# Altium PCB RFSOC_SAWG_Mezzanine.PcbDoc (part 1 of 2)
Units mm, origin at the board's own origin, x right, y up, seen from the top; angles counter-clockwise.
Board outline 64.4 x 72.39 mm, 4 copper layers (Top Layer, Layer 1, Layer 2, Bottom Layer), stack 1.429 mm thick; 92 components, 68 nets, 314 pads, 245 vias.
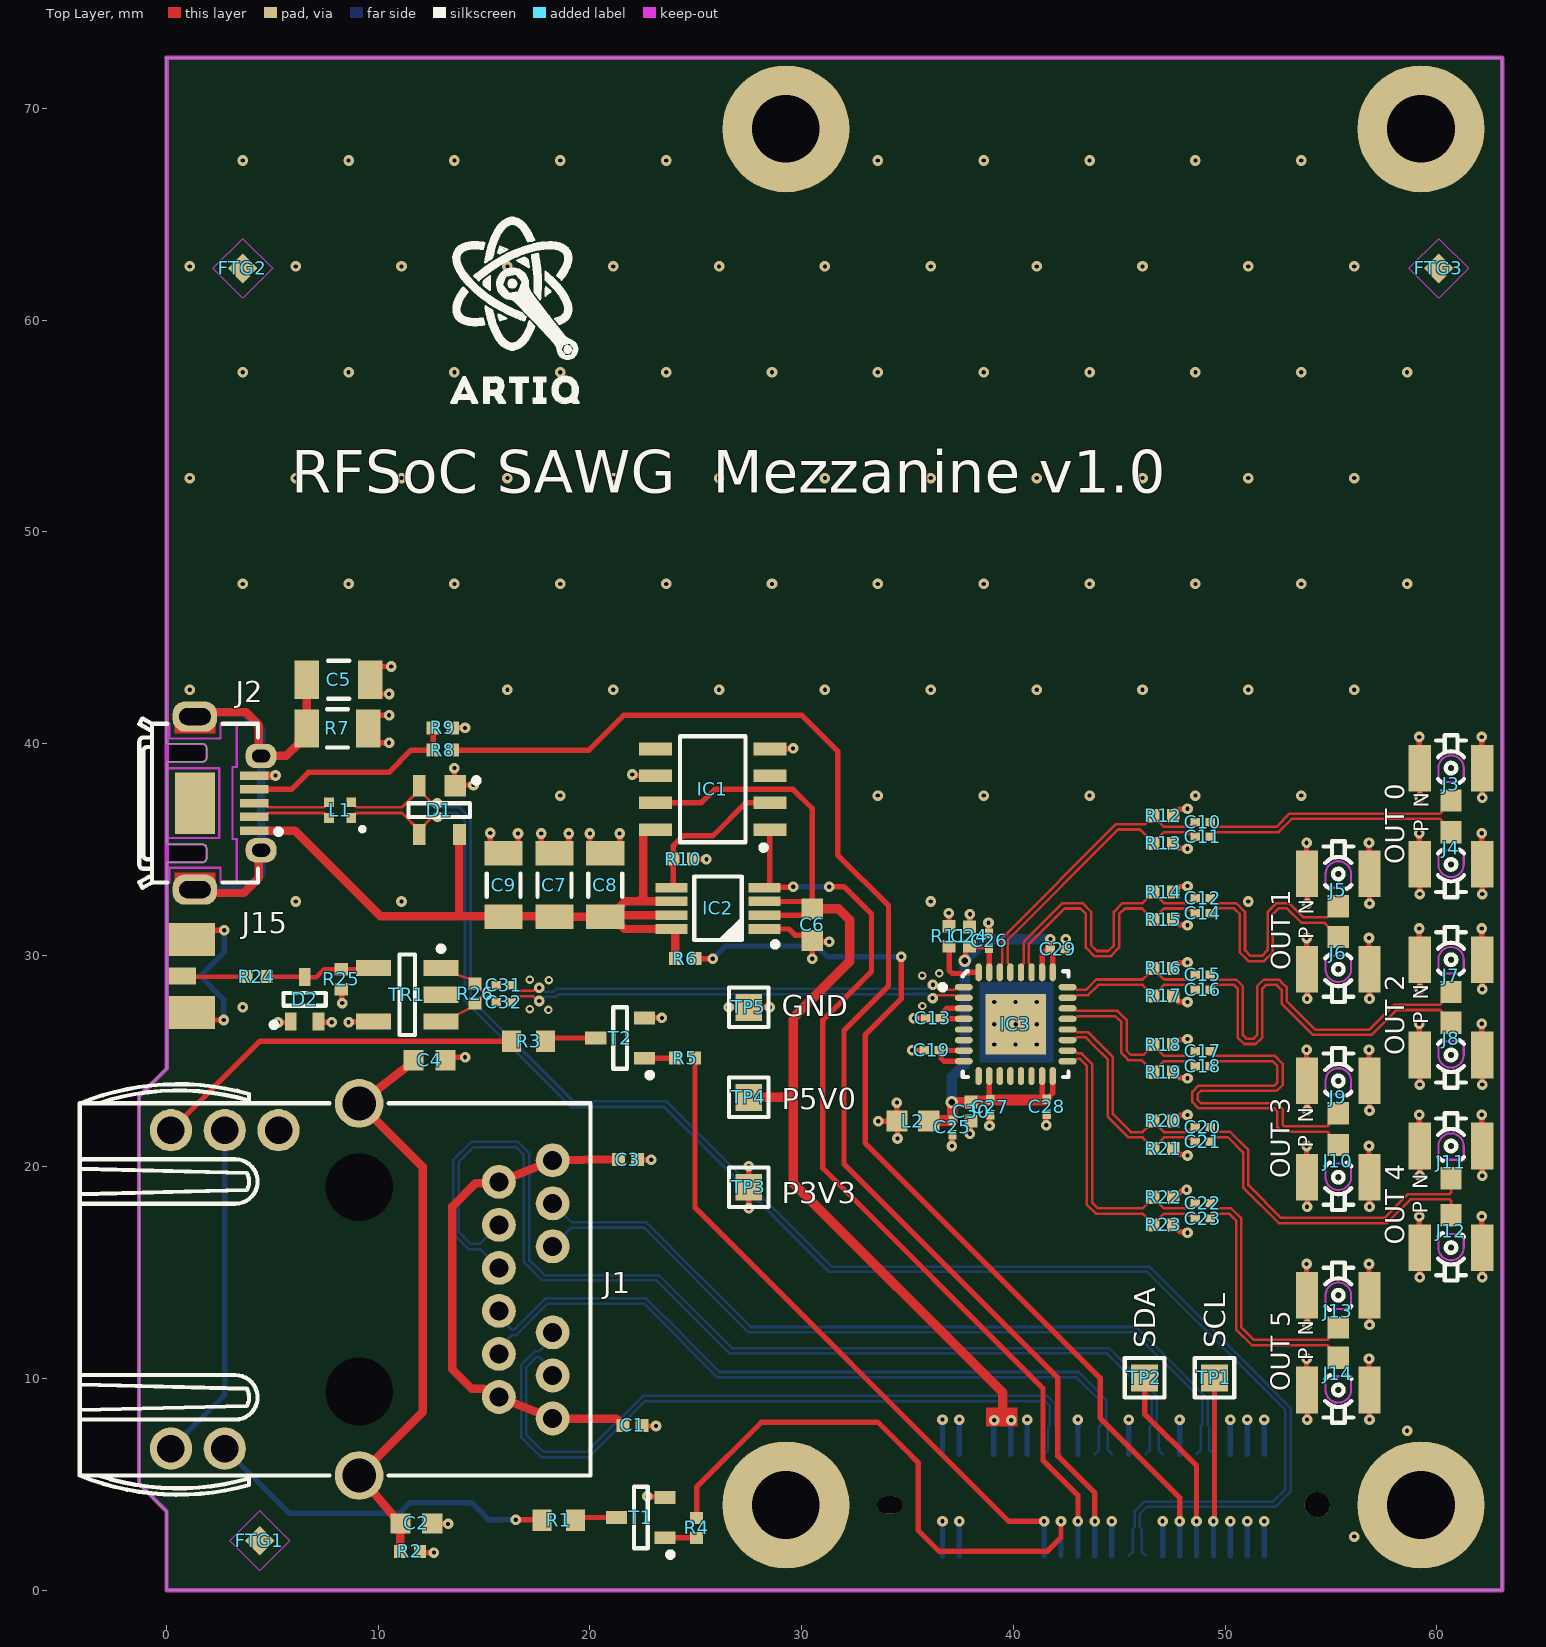
[diagram p0: Top Layer view]
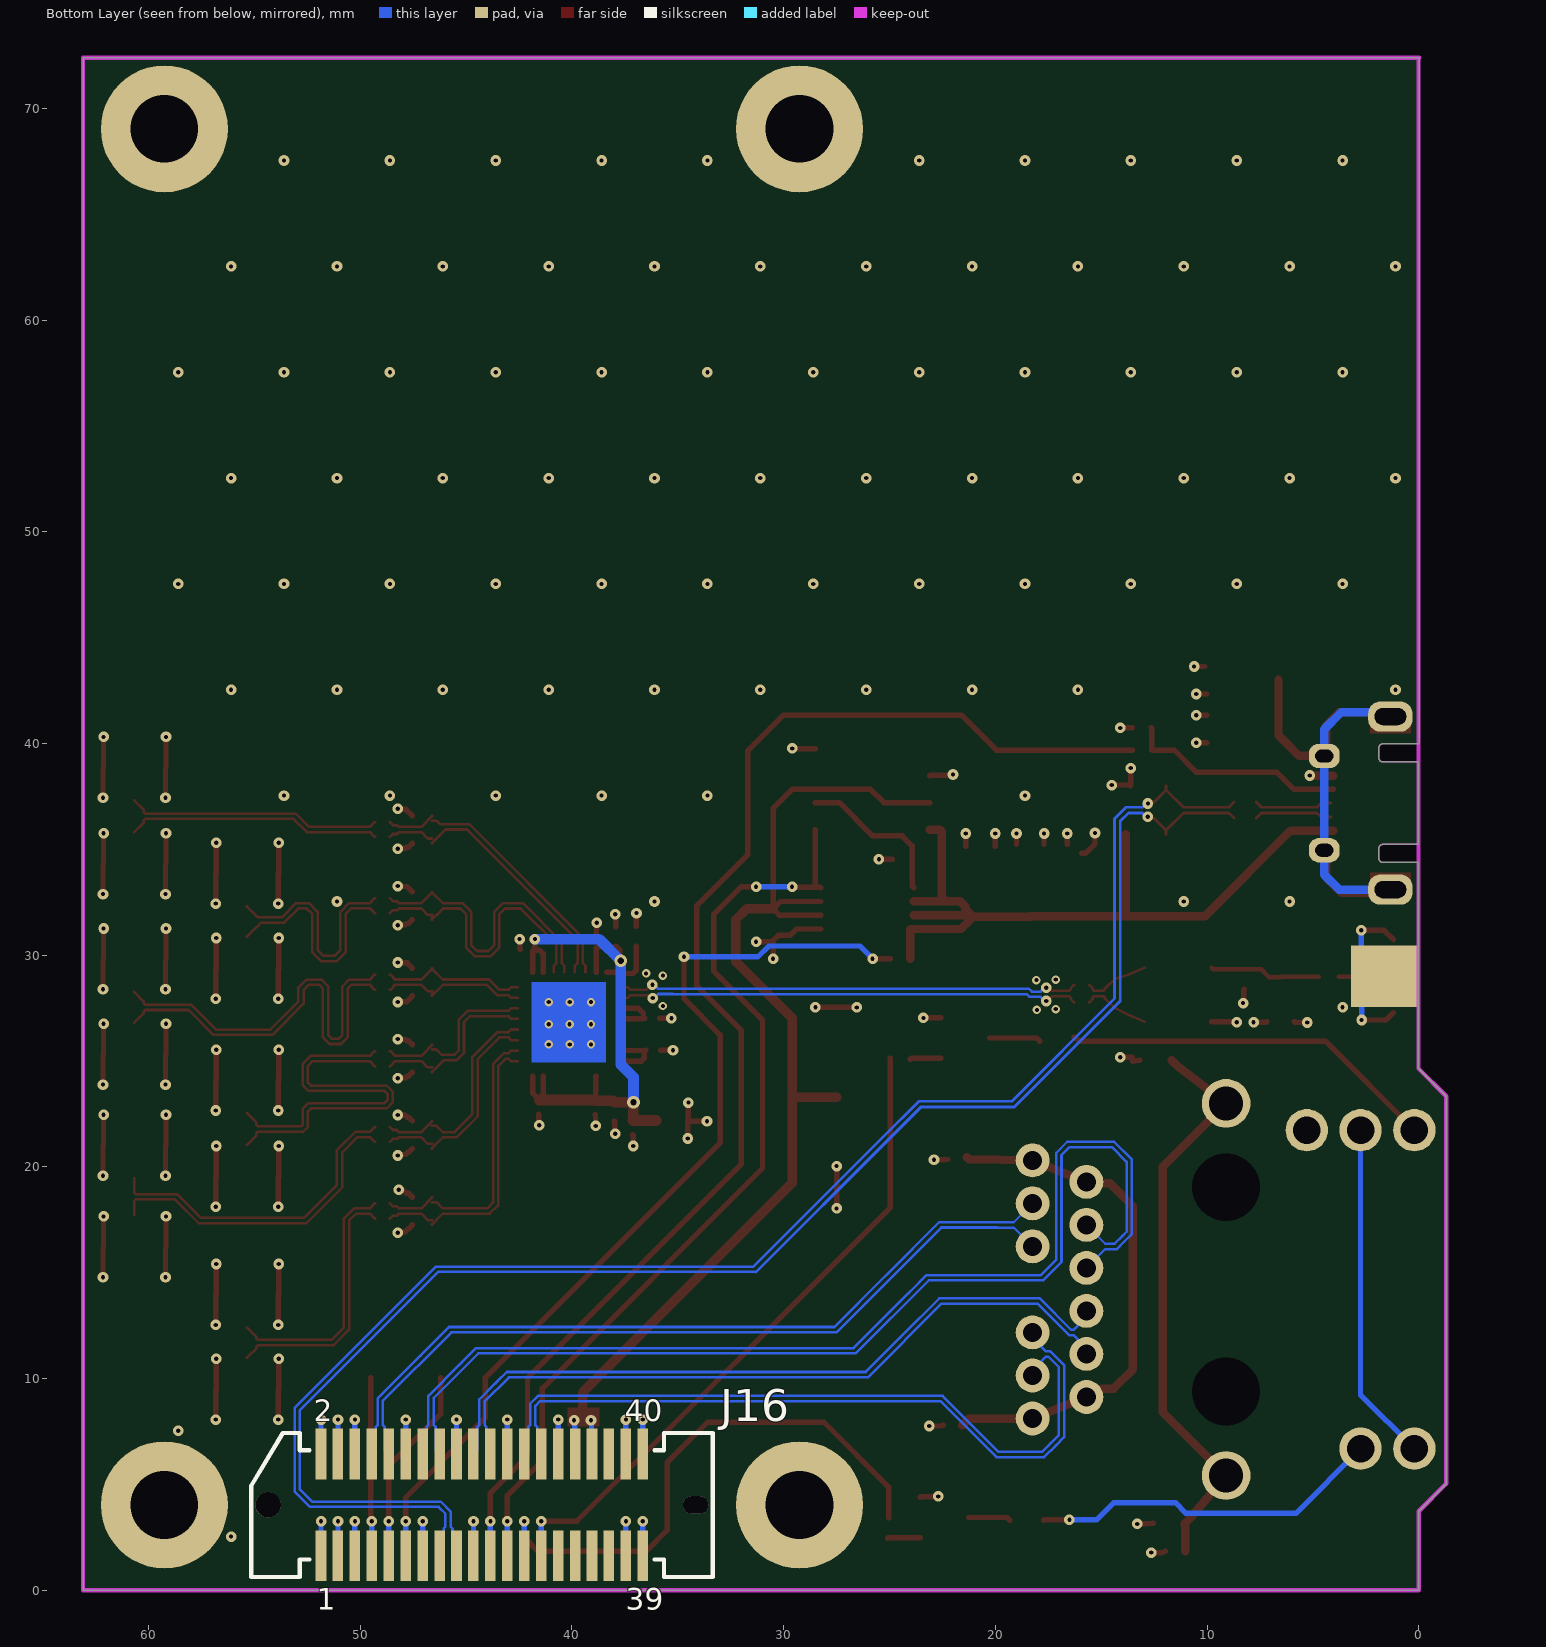
[diagram p1: Bottom Layer view, seen from below]
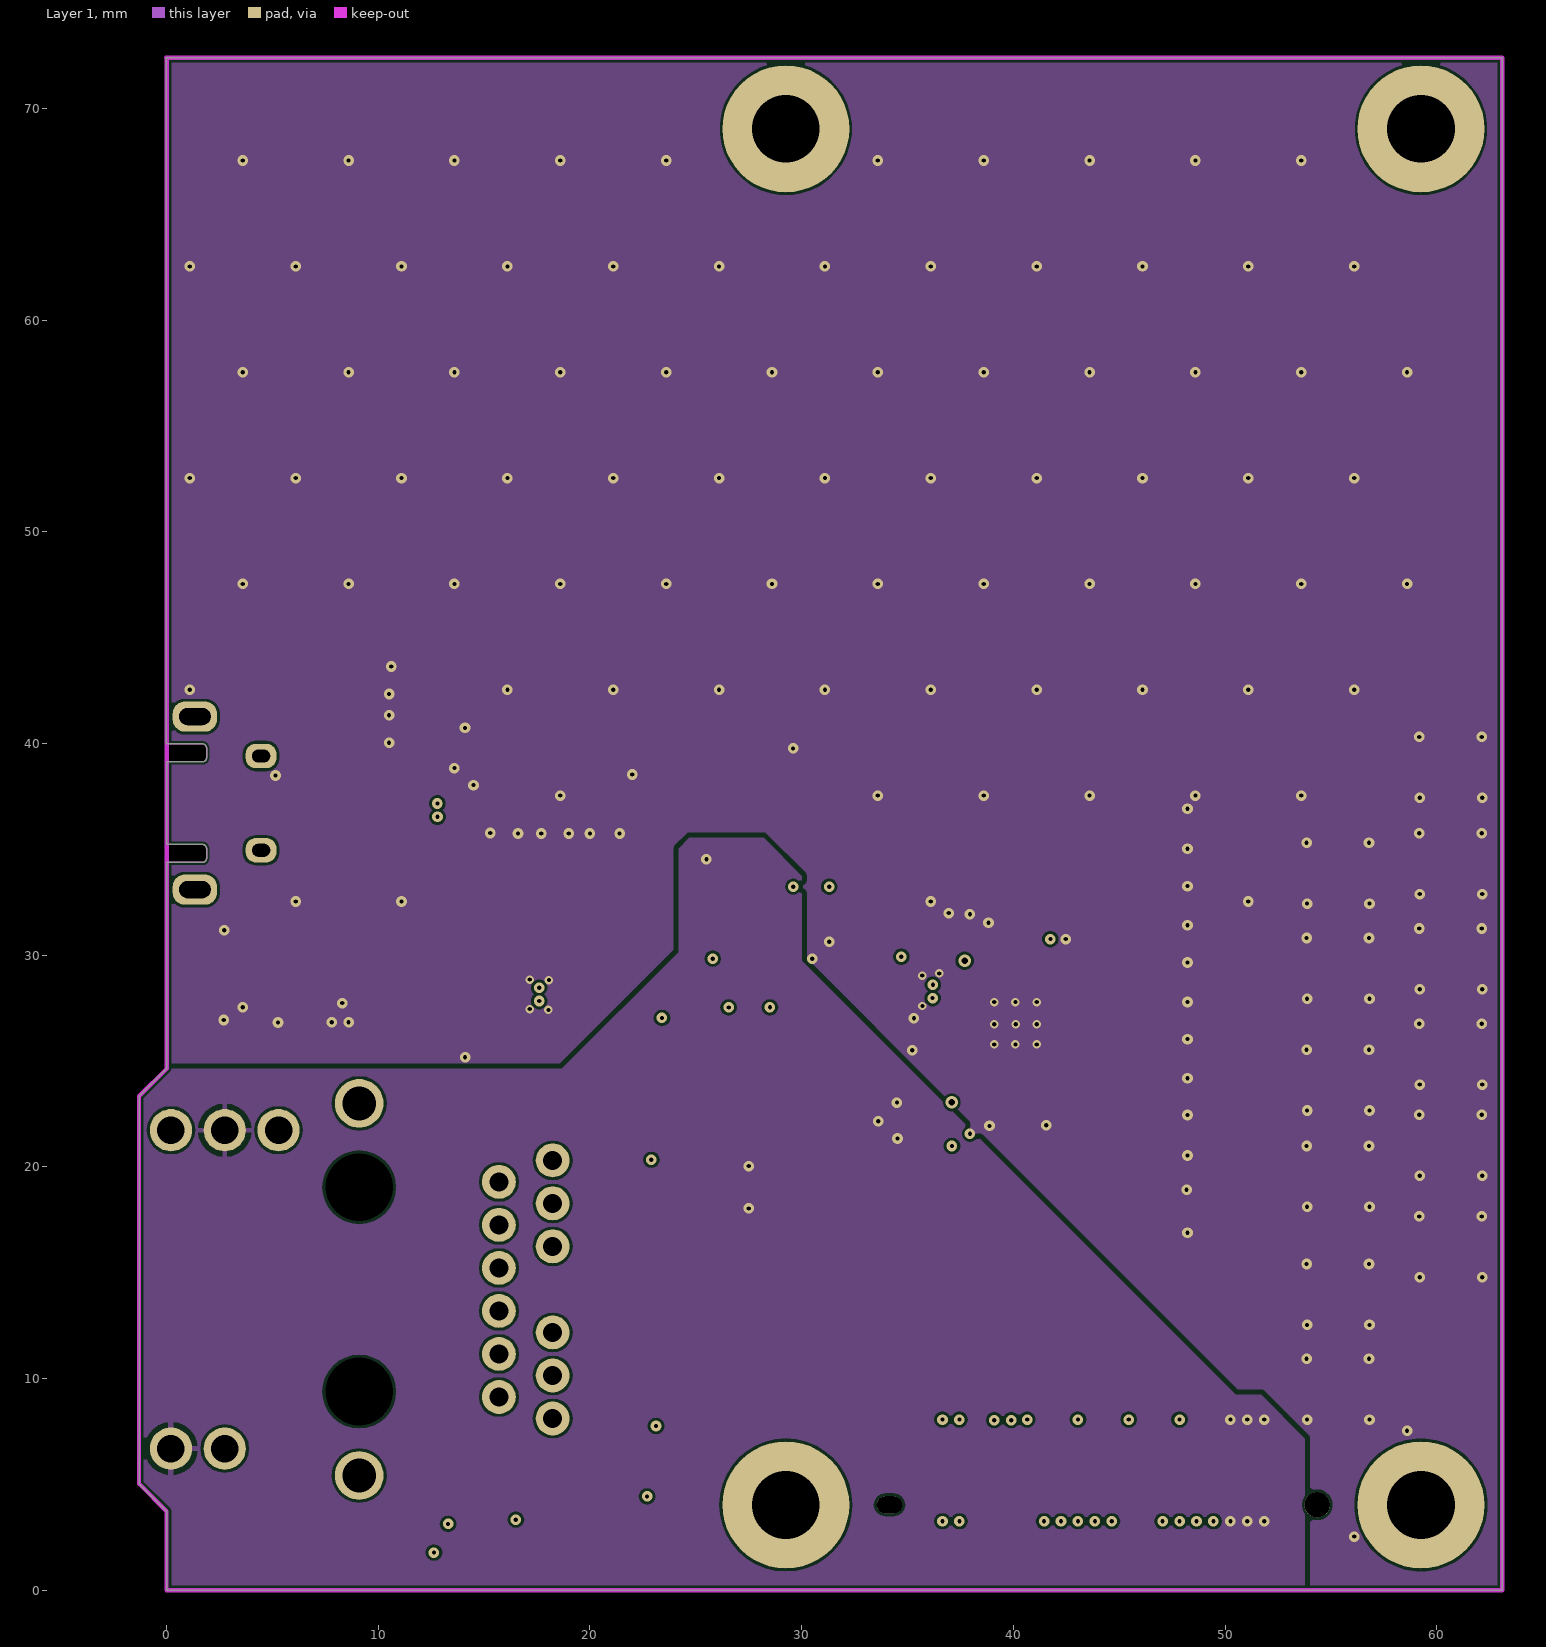
[diagram p2: Layer 1]
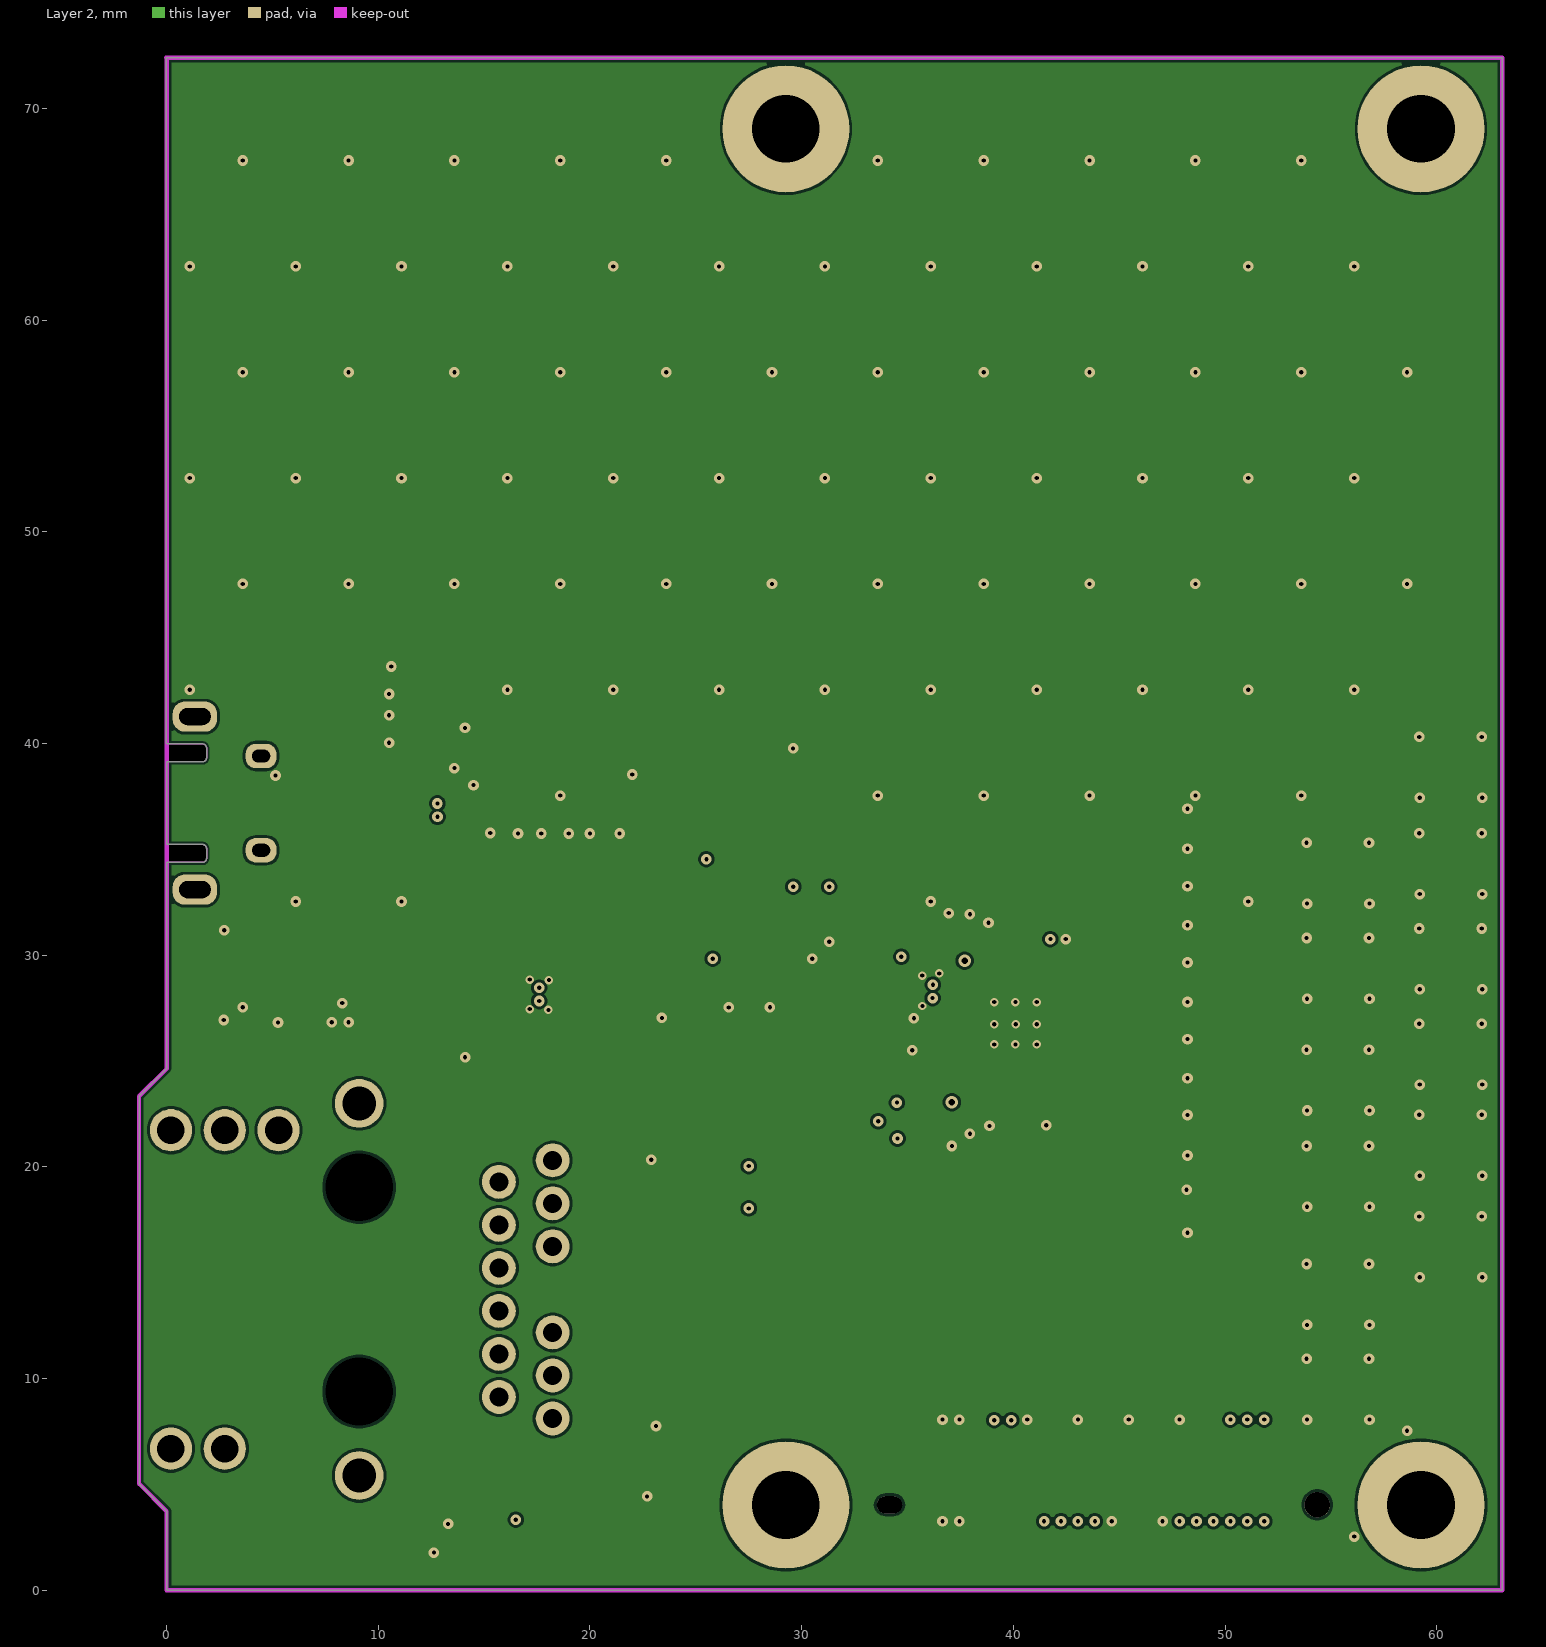
[diagram p3: Layer 2]
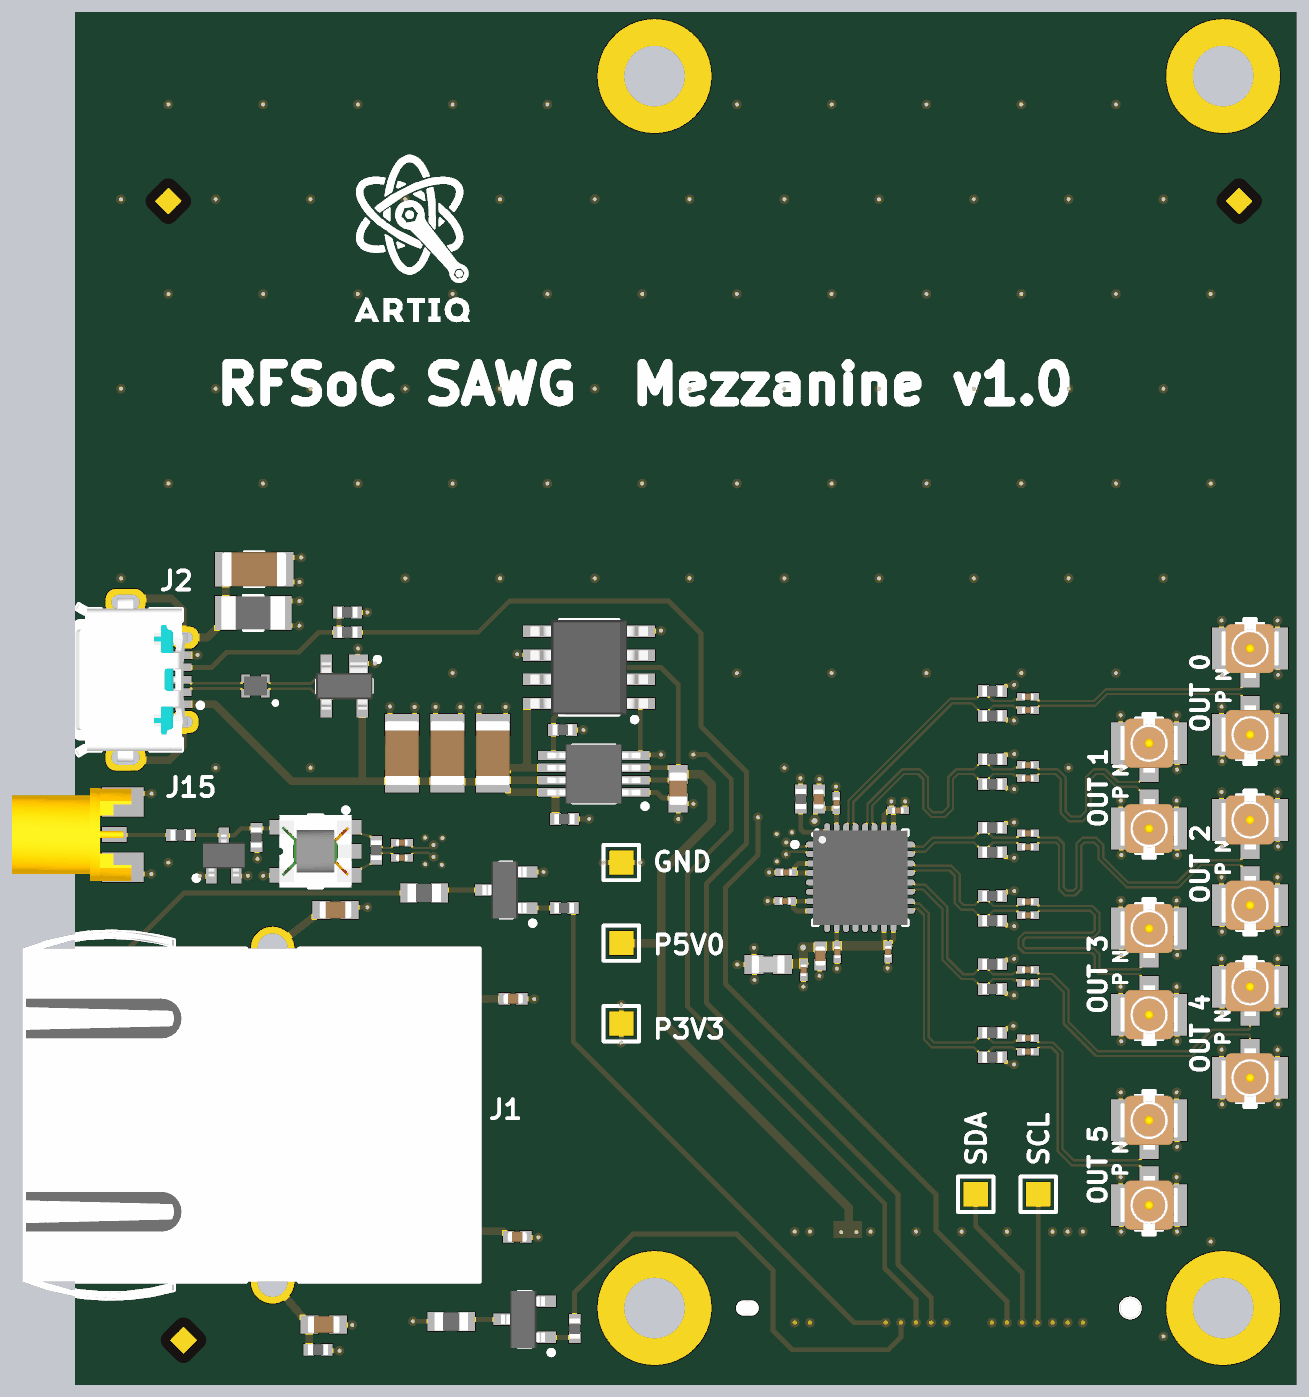
[diagram p5: 3D render of the assembled board from above, using the file's embedded part models]

## Layer stack, top to bottom
Top Solder: solder mask 0.0102, Solder Resist, Dk 3.5
Top Layer: signal copper 0.047
Dielectric 1: prepreg 0.11, FR-4, Dk 4.53
Layer 1: signal copper 0.0175
Dielectric 3: core 1.08, PP-006, Dk 4.53
Layer 2: signal copper 0.0175
Dielectric 2: prepreg 0.11, FR-4, Dk 4.53
Bottom Layer: signal copper 0.047
Bottom Solder: solder mask 0.0102, Solder Resist, Dk 3.5

## Board outline
0,1.035 0,3.735 -1.3,5.035 -1.3,23.335 -0.024,24.611 0.015,24.65 0.015,34.381 1.69,34.381 ccw(c1.69,34.581) 1.89,34.581 1.89,35.031 ccw(c1.69,35.031) 1.69,35.231 0.015,35.231 0.015,39.131 1.69,39.131 ccw(c1.69,39.331) 1.89,39.331 1.89,39.781 ccw(c1.69,39.781) 1.69,39.981 0.015,39.981 -0.024,40.02 -0.024,72.39 63.095,72.39 63.095,0 0,0

## Design rules (kind name [scope] priority, off if disabled: settings)
Clearance Clearance_J2 [InComponent('J2')   or InComponent('J15') vs IsKeepOut] p1: gap=0 ignorepadtopadclearanceinfootprint=FALSE
Clearance [All] p2: gap=0.13 ignorepadtopadclearanceinfootprint=FALSE except(0.254: Poly-Poly)
DiffPairsRouting "DiffPairsRouting  D90" [InDifferentialPairClass('90 Ohms Trace diff')] p1: maxlimit=0.254 minlimit=0.13 mostfreqgap=0.254 toplayer_maxgap=0.13 toplayer_prefgap=0.13 toplayer_minwidth=0.135 toplayer_maxwidth=0.135 toplayer_prefwidth=0.135 bottomlayer_maxgap=0.13 bottomlayer_prefgap=0.13 bottomlayer_minwidth=0.135 bottomlayer_maxwidth=0.135 bottomlayer_prefwidth=0.135 impedanceprofiledriven=TRUE impedanceprofileid={72E0920B-79AC-4615-891C-ACB3AE737586} impedanceprofilevalue=90.000000 maxuncoupledlength=12.7
DiffPairsRouting "DiffPairsRouting D100" [All] p2: maxlimit=0.254 minlimit=0.127 mostfreqgap=0.254 toplayer_mingap=0.13 toplayer_maxgap=0.13 toplayer_prefgap=0.13 toplayer_minwidth=0.12 toplayer_maxwidth=0.12 toplayer_prefwidth=0.12 bottomlayer_mingap=0.13 bottomlayer_maxgap=0.13 bottomlayer_prefgap=0.13 bottomlayer_minwidth=0.12 bottomlayer_maxwidth=0.12 bottomlayer_prefwidth=0.12 impedanceprofiledriven=TRUE impedanceprofileid={ECFD33D8-8AF5-47F1-B295-A9A58BAB6234} impedanceprofilevalue=100.000000 maxuncoupledlength=12.7
HoleSize [All] p1: absolutevalues=TRUE maxlimit=5 minlimit=0.2 maxpercent=80.000 minpercent=20.000
MatchedLengths [InxSignalClass('All xSignals')] p1: tolerance=0.5 checknetsindiffpair=FALSE checkdiffpairvsdiffpair=TRUE checkxsignals=TRUE checkothers=TRUE
MinimumSolderMaskSliver [All] p1: minsoldermaskwidth=0.01
PolygonConnect [All] p1: thpad.connectstyle=Relief thpad.reliefconductorwidth=0.254 thpad.reliefentries=4 thpad.polygonreliefangle="90 Angle" thpad.airgapwidth=0.254 smdpad.connectstyle=Direct smdpad.reliefconductorwidth=0.254 smdpad.reliefentries=4 smdpad.polygonreliefangle="90 Angle" smdpad.airgapwidth=0.254 via.connectstyle=Direct via.reliefconductorwidth=0.254 via.reliefentries=4 via.polygonreliefangle="90 Angle" via.airgapwidth=0.254
RoomDefinition U_MicroUSB [InComponentClass('U_MicroUSB')] p1: confinementstyle=ConfineIn formatcopy=TRUE lockcomponents=FALSE outline 80.494,8.535 90.781,8.535 90.781,-12.865 80.494,-12.865
RoomDefinition U_ETH-PHY [InComponentClass('U_ETH-PHY')] p2: confinementstyle=ConfineIn formatcopy=TRUE lockcomponents=FALSE outline 67.286,-12.765 88.2,-12.765 88.2,9.135 67.286,9.135
RoomDefinition U_Clock_fanout [InComponentClass('U_Clock_fanout')] p3: confinementstyle=ConfineIn formatcopy=TRUE lockcomponents=FALSE outline 94.845,-10.668 112.625,-10.668 112.625,9.652 94.845,9.652
RoomDefinition RFSOC_SAWG_Mezzanine [InComponentClass('RFSOC_SAWG_Mezzanine')] p4: confinementstyle=ConfineIn formatcopy=TRUE lockcomponents=FALSE outline 86.336,-13.081 70.588,-13.081 70.588,9.017 86.336,9.017
RoutingVias [All] p1: holewidth=0.2 width=0.5 viastyle="Through Hole" minholewidth=0.2 minwidth=0.4 maxholewidth=0.711 maxwidth=1.27
SilkToSilkClearance [All] p1: silktosilkclearance=0.1
SilkToSolderMaskClearance [IsPad] p1: minsilkscreentomaskgap=0.1 clearancetoexposedcopper=TRUE
SolderMaskExpansion SolderMaskExpansion_via [IsVia] p1: expansion=0.102 istentingtop=TRUE
SolderMaskExpansion [All] p2: expansion=0.05 istentingtop=FALSE
Width [All] p1: maxlimit=0.5 minlimit=0.12 preferedwidth=0.254
25 further rules are at their usual default settings.

## Classes and differential pairs
component class RFSOC_SAWG_Mezzanine: FTG1 FTG2 FTG3 J15 J16 TP1 TP2 TP3 TP4 TP5
differential pair class LVPECL: BUF_OUT0 BUF_OUT1 BUF_OUT2 BUF_OUT3 BUF_OUT4 BUF_OUT5 BUF_OUT6 BUF_OUT7 BUF_OUTC0 BUF_OUTC1 BUF_OUTC2 BUF_OUTC3 BUF_OUTC4 BUF_OUTC5 BUF_OUTC6 BUF_OUTC7
differential pair class Diff_100Ohm: EXT_CLK0 EXT_CLKC0
differential pair class "90 Ohms Trace diff": USB USB0_D
net class D90: USB0_D_N USB0_D_P USB_N USB_P
net class "50 Ohms Trace": EXT_CLK0 NetJ15_1
component class U_MicroUSB: C5 C6 C7 C8 C9 D1 IC1 IC2 IC8 J2 L1 R6 R7 R8 R9 R10
component class U_ETH-PHY: C1 C2 C3 C4 C55 C123 J1 J31 R1 R2 R3 R4 R5 R211 R212 R213 R214 R225 T1 T2 T24 T25
component class U_Clock_fanout: C10 C11 C12 C13 C14 C15 C16 C17 C18 C19 C20 C21 C22 C23 C24 C25 C26 C27 C28 C29 C30 C31 C32 D2 IC3 J3 J4 J5 J6 J7 J8 J9 J10 J11 J12 J13 J14 L2 R11 R12 R13 R14 R15 R16 R17 R18 R19 R20 R21 R22 R23 R24 R25 R26 TR1
differential pair USB: +USB_P -USB_N
differential pair USB0_D: +USB0_D_P -USB0_D_N
differential pair PHY_MDI3: +PHY_MDI3_P -PHY_MDI3_N
differential pair PHY_MDI2: +PHY_MDI2_P -PHY_MDI2_N
differential pair PHY_MDI1: +PHY_MDI1_P -PHY_MDI1_N
differential pair PHY_MDI0: +PHY_MDI0_P -PHY_MDI0_N
differential pair EXT_CLKC0: +EXT_CLKC0_P -EXT_CLKC0_N
differential pair EXT_CLK0: +EXT_CLK0_P -EXT_CLK0_N
differential pair BUF_OUTC5: +BUF_OUTC5_P -BUF_OUTC5_N
differential pair BUF_OUTC4: +BUF_OUTC4_P -BUF_OUTC4_N
differential pair BUF_OUTC3: +BUF_OUTC3_P -BUF_OUTC3_N
differential pair BUF_OUTC2: +BUF_OUTC2_P -BUF_OUTC2_N
differential pair BUF_OUTC1: +BUF_OUTC1_P -BUF_OUTC1_N
differential pair BUF_OUTC0: +BUF_OUTC0_P -BUF_OUTC0_N
differential pair BUF_OUT5: +BUF_OUT5_P -BUF_OUT5_N
differential pair BUF_OUT4: +BUF_OUT4_P -BUF_OUT4_N
differential pair BUF_OUT3: +BUF_OUT3_P -BUF_OUT3_N
differential pair BUF_OUT2: +BUF_OUT2_P -BUF_OUT2_N
differential pair BUF_OUT1: +BUF_OUT1_P -BUF_OUT1_N
differential pair BUF_OUT0: +BUF_OUT0_P -BUF_OUT0_N

## Components (designator, comment, footprint, x,y, rotation, side; value= is the part's Value field where it differs from the comment)
C1 "100nF" CAPC1005X55N 22.015,7.791 r0 top
C2 "Undefined" CAPC1608X90N 11.8,3.16 r0 top
C3 "100nF" CAPC1005X55N 21.792,20.346 r180 top
C4 "Undefined" CAPC1608X90N 12.421,25.037 r0 top
C5 "47pF" CAPC3216X140N 8.125,43.01 r0 top
C6 "10uF" CAPC1608X80N 30.5,31.435 r270 top
C7 "47uF" CAPC3216X180N 18.325,33.31 r90 top
C8 "47uF" CAPC3216X180N 20.725,33.31 r270 top
C9 "47uF" CAPC3216X180N 15.925,33.31 r270 top
C10 "100nF" CAPC0603X33N 48.952,36.285 r0 top
C11 "100nF" CAPC0603X33N 48.952,35.583 r0 top
C12 "100nF" CAPC0603X33N 48.952,32.687 r0 top
C13 "100nF" CAPC0603X33N 36.202,27.021 r0 top
C14 "100nF" CAPC0603X33N 48.952,31.985 r0 top
C15 "100nF" CAPC0603X33N 48.952,29.079 r0 top
C16 "100nF" CAPC0603X33N 48.952,28.36 r0 top
C17 "100nF" CAPC0603X33N 48.952,25.469 r0 top
C18 "100nF" CAPC0603X33N 48.952,24.76 r0 top
C19 "100nF" CAPC0603X33N 36.15,25.51 r0 top
C20 "100nF" CAPC0603X33N 48.952,21.88 r0 top
C21 "100nF" CAPC0603X33N 48.952,21.185 r0 top
C22 "100nF" CAPC0603X33N 48.952,18.275 r0 top
C23 "100nF" CAPC0603X33N 48.952,17.56 r0 top
C24 "1uF" CAPC1005X55N 37.925,30.885 r270 top
C25 "100nF" CAPC0603X33N 37.125,21.86 r90 top
C26 "100nF" CAPC0603X33N 38.85,30.685 r270 top
C27 "100nF" CAPC0603X33N 38.9,22.81 r90 top
C28 "100nF" CAPC0603X33N 41.575,22.835 r90 top
C29 "470nF" CAPC0603X33N 42.1,30.285 r180 top
C30 "22pF" CAPC1005X55N 38,22.61 r90 top
C31 "100nF" CAPC0603X33N 15.925,28.585 r0 top
C32 "100nF" CAPC0603X33N 15.925,27.785 r0 top
D1 "PRTR5V0U2X" SOT190P230X110-4N 12.884,36.851 r270 top
D2 "BAS70-04W" SOT65P210X110-3N 6.525,27.91 r90 top
FTG1 "Use only in PCB" FIDUCIAL_TOP_S100-200 4.4,2.335 r90 top
FTG2 "Use only in PCB" FIDUCIAL_TOP_S100-200 3.6,62.435 r90 top
FTG3 "Use only in PCB" FIDUCIAL_TOP_S100-200 60.1,62.435 r90 top
IC1 "AP2196SG-13" SOIC127P600X175-8N 25.8,37.835 r180 top
IC2 "BD82046FVJ" SOP65P490X110-8N 26.05,32.21 r180 top
IC3 "ADCLK948BCPZ" QFN50P500X500X80-33N-S285 40.11,26.738 r0 top
J1 "RJ45" BEL_L829-1J1T-43 16.97,14.21 r90 top
J2 "Micro-USB AB 2.0" HIROSE_ZX62RD-AB-5P8 4.14,37.181 r270 top
J3 "U.FL" HIROSE_U.FL-R-SMT-1(10) 60.675,38.835 r0 top
J4 "U.FL" HIROSE_U.FL-R-SMT-1(10) 60.675,34.285 r180 top
J5 "U.FL" HIROSE_U.FL-R-SMT-1(10) 55.35,33.835 r0 top
J6 "U.FL" HIROSE_U.FL-R-SMT-1(10) 55.35,29.335 r180 top
J7 "U.FL" HIROSE_U.FL-R-SMT-1(10) 60.675,29.785 r0 top
J8 "U.FL" HIROSE_U.FL-R-SMT-1(10) 60.675,25.285 r180 top
J9 "U.FL" HIROSE_U.FL-R-SMT-1(10) 55.35,24.06 r0 top
J10 "U.FL" HIROSE_U.FL-R-SMT-1(10) 55.35,19.51 r180 top
J11 "U.FL" HIROSE_U.FL-R-SMT-1(10) 60.675,20.985 r0 top
J12 "U.FL" HIROSE_U.FL-R-SMT-1(10) 60.675,16.185 r180 top
J13 "U.FL" HIROSE_U.FL-R-SMT-1(10) 55.35,13.935 r0 top
J14 "U.FL" HIROSE_U.FL-R-SMT-1(10) 55.35,9.46 r180 top
J15 "SMP" AMPHENOL_302102 0.746,29.009 r0 top
J16 "658807713040" 658807713040 44.253,4.032 r180 bottom
L1 "90@100MHz" IND_WURTH_WE-CNSW_0504 8.2,36.853 r180 top
L2 "120R@100MHz" INDC1608X65N 35.25,22.16 r180 top
R1 "340" RESC1608X55N 18.525,3.31 r180 top
R2 "0" RESC1005X40N 11.5,1.835 r180 top
R3 "340" RESC1608X55N 17.1,25.935 r180 top
R4 "1k" RESC1005X40N 25.038,2.947 r270 top
R5 "1k" RESC1005X40N 24.491,25.14 r180 top
R6 "10k" RESC1005X40N 24.5,29.835 r0 top
R7 "1M" RESC3216X65N 8.075,40.71 r0 top
R8 "0" RESC1005X40N 13.05,39.685 r0 top
R9 "0" RESC1005X40N 13.05,40.735 r180 top
R10 "10k" RESC1005X40N 24.4,34.535 r180 top
R11 "10k" RESC1005X40N 36.967,30.891 r270 top
R12 "200" RESC1005X40N 47.08,36.585 r0 top
R13 "200" RESC1005X40N 47.08,35.283 r0 top
R14 "200" RESC1005X40N 47.08,32.98 r0 top
R15 "200" RESC1005X40N 47.08,31.678 r0 top
R16 "200" RESC1005X40N 47.08,29.376 r0 top
R17 "200" RESC1005X40N 47.08,28.074 r0 top
R18 "200" RESC1005X40N 47.08,25.771 r0 top
R19 "200" RESC1005X40N 47.08,24.469 r0 top
R20 "200" RESC1005X40N 47.08,22.167 r0 top
R21 "200" RESC1005X40N 47.08,20.865 r0 top
R22 "200" RESC1005X40N 47.08,18.562 r0 top
R23 "200" RESC1005X40N 47.08,17.26 r0 top
R24 "0" RESC1005X40N 4.25,28.985 r0 top
R25 "Undefined" RESC1005X40N 8.25,28.86 r270 top
R26 "100" RESC1005X35N 14.575,28.185 r270 top
T1 "BC847B" SOT95P230X110-3N 22.4,3.435 r180 top
T2 "BC847B" SOT95P230X110-3N 21.425,26.085 r180 top
TP1 "Test Point" TPS127 49.5,10.035 r90 top
TP2 "Test Point" TPS127 46.2,10.035 r90 top
TP3 "Test Point" TPS127 27.5,19.035 r90 top
TP4 "Test Point" TPS127 27.5,23.285 r90 top
TP5 "Test Point" TPS127 27.5,27.535 r90 top
TR1 "1:1" XFMR_MINI-CIRCUITS_AT224 11.365,28.13 r270 top

## Footprints (in the part's own frame and the unit in brackets; to place one, negate y for a bottom-side part, rotate by r counter-clockwise, add the part's x,y. Pads: shape width x height; smd on the part's side, far side on the other; paste and mask are expansions set on the pad)
658807713040 [mm] "0.80mm SMT Female Shrouded Vertical Receptacle with Chamfer 7.75mm height, 40p"
  rect 0.5x2.4 smd: 1(-7.6,-2.4) 2(-7.6,2.4) 3(-6.8,-2.4) 4(-6.8,2.4) 5(-6,-2.4) 6(-6,2.4) 7(-5.2,-2.4) 8(-5.2,2.4) 9(-4.4,-2.4) 10(-4.4,2.4) 11(-3.6,-2.4) 12(-3.6,2.4) 13(-2.8,-2.4) 14(-2.8,2.4) 15(-2,-2.4) 16(-2,2.4) 17(-1.2,-2.4) 18(-1.2,2.4) 19(-0.4,-2.4) 20(-0.4,2.4) 21(0.4,-2.4) 22(0.4,2.4) 23(1.2,-2.4) 24(1.2,2.4) 25(2,-2.4) 26(2,2.4) 27(2.8,-2.4) 28(2.8,2.4) 29(3.6,-2.4) 30(3.6,2.4) 31(4.4,-2.4) 32(4.4,2.4) 33(5.2,-2.4) 34(5.2,2.4) 35(6,-2.4) 36(6,2.4) 37(6.8,-2.4) 38(6.8,2.4) 39(7.6,-2.4) 40(7.6,2.4)
  round 1.2 hole 1.2 unplated: M1(-10.1,0)
  oval 1.2x0.8 hole 0.8 slot 1.2 at 0 deg unplated: M2(10.1,0)
  silkscreen extent -10.9,-3.4 10.9,3.4, body extent -10.9,-3.4 10.9,3.4, height 7.97
AMPHENOL_302102 [mm] "50 Ohm RF Connector, SMP End Launch Jack for 1.6mm PCB,  Flat Tab Contact"
  rect 1.3x0.8 smd: 1(0,0)
  rect 2.2x1.55 smd: 2(0.45,-1.725) 2(0.45,1.725)
  rect 3.2x2.9 smd far side: 2(0.85,0)
  body extent -5.39,-2.45 2.41,2.45, height 2.64
BEL_L829-1J1T-43 [mm] "1 Port, Yellow/Green-Orange LEDs, Gigabit Ethernet, MagJack Connector Module"
  round 1.6 hole 0.9: 1(-5.08,1.27) 2(-3.048,1.27) 3(-1.016,1.27) 4(1.016,1.27) 5(3.048,1.27) 6(5.08,1.27) 7(-6.096,-1.27) 8(-4.064,-1.27) 9(-2.032,-1.27) 10(2.032,-1.27) 11(4.064,-1.27) 12(6.096,-1.27)
  round 2 hole 1.3: 13(-7.52,14.22) 14(-7.52,16.76) 15(7.52,11.68) 16(7.52,14.22) 17(7.52,16.76)
  round 2.3 hole 1.6: 18(-8.79,7.87) 19(8.79,7.87)
  round 1 hole 3.2 unplated mask+1.1: 20(-4.825,7.87) 21(4.825,7.87)
  silkscreen extent -9.7,-3.06 9.7,21.07, body extent -9.7,-3.06 9.69,21.07, height 12.21
CAPC0603X33N [mm] "Chip Capacitor, Body 0.6x0.30mm, IPC Medium Density"
  rect 0.45x0.4 smd: 1(-0.35,0) 2(0.35,0)
  body extent -0.31,-0.16 0.32,0.17, height 0.33
CAPC1005X55N [mm] "Capacitor, Non-Polarized, Chip; 1.00mm L X 0.50mm W X 0.70mm H, IPC Medium Density"
  rect 0.62x0.62 smd: 1(-0.45,0) 2(0.45,0)
  body extent -0.52,-0.27 0.53,0.28, height 0.55
CAPC1608X80N [mm] "Chip Capacitor, Body 1.6x0.8mm IPC Medium Density"
  rect 1x1 smd: 1(-0.75,0) 2(0.75,0)
  body extent -0.87,-0.47 0.88,0.48, height 0.8
CAPC1608X90N [mm] "Chip Capacitor, Body 1.6x0.8mm IPC Medium Density"
  rect 0.95x0.95 smd: 1(-0.75,0) 2(0.75,0)
  body extent -0.85,-0.45 0.85,0.45, height 0.9
CAPC3216X140N [mm] "Chip Capacitor, Body 3.2x1.6mm, IPC Medium Density"
  rect 1.15x1.8 smd: 1(-1.5,0) 2(1.5,0)
  silkscreen extent -0.5,-0.9 0.5,0.9, body extent -1.7,-0.9 1.7,0.9, height 1.4
CAPC3216X180N [mm] "Chip Capacitor, Body 3.2x1.6mm, IPC Medium Density"
  rect 1.15x1.8 smd: 1(-1.5,0) 2(1.5,0)
  silkscreen extent -0.55,-0.8 0.55,0.8, body extent -1.7,-0.9 1.7,0.9, height 1.8
FIDUCIAL_TOP_S100-200 [mm] "Square Fiducial Target, Top Layer, 1.0mm, Top Solder 2.0mm, Keepout =2.0mm"
  rect 1x1 smd rot 45 paste-0.51 mask+0.5: 1(0,0)
  Top Layer keep-out region: 1.414,0 0,-1.414 -1.414,0 0,1.414
HIROSE_U.FL-R-SMT-1(10) [mm] "Up to 6GHz Ultra Small Surface Mount Male Coaxial Connectors U.FL Series"
  rect 1x1.05 smd: 1(0,-1.525)
  rect 1.05x2.2 smd: 2(-1.475,0) 2(1.475,0)
  Top Layer keep-out lines w0.1: -0.6,-0.65 -0.6,0 cw(c0,0) 0.6,0 0.6,-0.65 -0.6,-0.65
  silkscreen extent -0.7,-0.69 0.7,1.55, body extent -1.5,-1.55 1.5,1.55, height 1.25
HIROSE_ZX62RD-AB-5P8 [mm] "Right Angle, SMD Micro-USB Type AB - Reverse (Top mount), Shell Through Hole"
  rect 0.4x1.35 smd: 1(1.3,0) 2(0.65,0) 3(0,0) 4(-0.65,0) 5(-1.3,0)
  rrect80% 1.425x2.1 hole 0.8 slot 1.5 at 90 deg: 6(-4.088,-2.8) 6(4.088,-2.8)
  rrect80% 1.15x1.45 hole 0.6 slot 0.85 at 90 deg: 6(-2.225,0.325) 6(2.225,0.325)
  rect 2.9x1.9 smd: PastePad(0,-2.8)
  Top Layer region: -4.2,-1.85 -4.2,-3.75 -3.3,-3.75 -3.3,-3.75 -3.3,-1.85
  Top Layer region: 4.2,-3.75 4.2,-1.85 3.3,-1.85 3.3,-1.85 3.3,-3.75
  Top Layer keep-out lines w0.1: 3.75,-4.125 3.75,-4 3.05,-4 3.05,-1.6 3.75,-1.6 3.75,-0.825 1.7,-0.825 1.7,-1.025 -1.7,-1.025 -1.7,-0.825 -3.75,-0.825 -3.75,-1.6 -3.05,-1.6 -3.05,-4 -3.75,-4 -3.75,-4.125 -2.8,-4.125 -2.8,-2.45 cw(c-2.6,-2.45) -2.6,-2.25 -2.15,-2.25 cw(c-2.15,-2.45) -1.95,-2.45 -1.95,-4.125 -1.65,-4.125 -1.65,-1.65 1.65,-1.65 1.65,-4.125 1.95,-4.125 1.95,-2.45 cw(c2.15,-2.45) 2.15,-2.25 2.6,-2.25 cw(c2.6,-2.45) 2.8,-2.45 2.8,-4.125 3.75,-4.125
  Keep-Out Layer board cut-out: 1.95,-4.125 1.95,-2.45 1.965,-2.373 2.009,-2.309 2.074,-2.265 2.15,-2.25 2.15,-2.25 2.6,-2.25 2.677,-2.265 2.741,-2.309 2.785,-2.373 2.8,-2.45 2.8,-2.45 2.8,-4.125
  Keep-Out Layer board cut-out: -2.8,-4.125 -2.8,-2.45 -2.785,-2.373 -2.741,-2.309 -2.676,-2.265 -2.6,-2.25 -2.6,-2.25 -2.15,-2.25 -2.073,-2.265 -2.009,-2.309 -1.965,-2.373 -1.95,-2.45 -1.95,-2.45 -1.95,-4.125
  silkscreen extent -4,-5.42 4,1.28, body extent -4.32,-5.42 4.33,0.47, height 2.78
IND_WURTH_WE-CNSW_0504 [mm] "Common Mode SMD Line Filter, Body 1.2x1.4mm"
  rect 0.45x0.45 smd: 1(-0.525,0.375) 2(0.525,0.375) 3(0.525,-0.375) 4(-0.525,-0.375)
  silkscreen extent -1.15,0.8 -0.95,1, body extent -0.6,-0.5 0.6,0.5, height 0.89
INDC1608X65N [mm] "Chip Inductor, 2-Leads, EIA 0603, Metric 1608, Body 1.6x0.8mm, IPC Medium Density"
  rect 1x1 smd: 1(-0.75,0) 2(0.75,0)
  body extent -0.87,-0.47 0.88,0.48, height 0.65
QFN50P500X500X80-33N-S285 [mm] "QFN, 0.50mm Pitch, Square; 8 Pin X 8 Pin, 5mm X 5mm X 0.80mm H body (w/thermal tab 2.85 X 2.85mm),  IPC Medium Density"
  oval 0.85x0.3 smd: 1(-2.45,1.75) 2(-2.45,1.25) 3(-2.45,0.75) 4(-2.45,0.25) 5(-2.45,-0.25) 6(-2.45,-0.75) 7(-2.45,-1.25) 8(-2.45,-1.75) 17(2.45,-1.75) 18(2.45,-1.25) 19(2.45,-0.75) 20(2.45,-0.25) 21(2.45,0.25) 22(2.45,0.75) 23(2.45,1.25) 24(2.45,1.75)
  oval 0.3x0.85 smd: 9(-1.75,-2.45) 10(-1.25,-2.45) 11(-0.75,-2.45) 12(-0.25,-2.45) 13(0.25,-2.45) 14(0.75,-2.45) 15(1.25,-2.45) 16(1.75,-2.45) 25(1.75,2.45) 26(1.25,2.45) 27(0.75,2.45) 28(0.25,2.45) 29(-0.25,2.45) 30(-0.75,2.45) 31(-1.25,2.45) 32(-1.75,2.45)
  rect 2.85x2.85 smd: 33(0,0)
  silkscreen extent -3.57,-2.5 2.5,2.5, body extent -2.5,-2.5 2.5,2.5, height 0.8
RESC1005X35N [mm] "Chip Resistor, EIA 0402, Metric 1005, Body 1.0x0.5mm, IPC Medium Density"
  rect 0.58x0.62 smd: 1(-0.47,0) 2(0.47,0)
  body extent -0.52,-0.27 0.53,0.28, height 0.35
RESC1005X40N [mm] "Chip Resistor, EIA 0402, Metric 1005, Body 1.0x0.5mm, IPC Medium Density"
  rect 0.58x0.62 smd: 1(-0.47,0) 2(0.47,0)
  body extent -0.52,-0.27 0.53,0.28, height 0.4
RESC1608X55N [mm] "Chip Resistor, EIA 0603, Metric 1608, Body 1.6x0.8mm, IPC Medium Density"
  rect 0.9x1 smd: 1(-0.8,0) 2(0.8,0)
  body extent -0.87,-0.47 0.88,0.48, height 0.55
RESC3216X65N [mm] "Chip Resistor, EIA 1206, Metric 3216, Body 3.2x1.6mm, IPC Medium Density"
  rect 1.15x1.8 smd: 1(-1.45,0) 2(1.45,0)
  silkscreen extent -0.5,-0.9 0.5,0.9, body extent -1.67,-0.87 1.68,0.88, height 0.65
SOIC127P600X175-8N [mm] "SOIC 8, Pitch 1.27mm - Body 4x5mm, IPC Medium Density"
  rect 1.55x0.6 smd: 1(-2.7,1.905) 2(-2.7,0.635) 3(-2.7,-0.635) 4(-2.7,-1.905) 5(2.7,-1.905) 6(2.7,-0.635) 7(2.7,0.635) 8(2.7,1.905)
  silkscreen extent -2.53,-2.5 1.55,2.88, body extent -3.1,-2.5 3.1,2.5, height 1.75
SOP65P490X110-8N [mm] "SOP, 0.65mm pitch; 8 pin, 3.00mm W X 3.00mm L X 1.10mm H body, IPC Medium Density"
  rect 1.5x0.45 smd: 1(-2.2,0.975) 2(-2.2,0.325) 3(-2.2,-0.325) 4(-2.2,-0.975) 5(2.2,-0.975) 6(2.2,-0.325) 7(2.2,0.325) 8(2.2,0.975)
  silkscreen extent -2.83,-1.5 1.12,1.82, body extent -2.45,-1.55 2.45,1.55, height 1.1
SOT65P210X110-3N [mm] "SOT323, 0.65mm pitch; 3 pin, 1.25mm W X 2.00mm L, IPC Medium Density"
  rect 0.85x0.55 smd: 1(-1.05,0.65) 2(-1.05,-0.65) 3(1.05,0)
  silkscreen extent -1.32,-1 0.3,1.57, body extent -1.1,-1.1 1.1,1.1, height 1.1
SOT95P230X110-3N [mm] "SOT23, 3 pin, Pitch 0.95mm - 1.3mm W X 2.9mm L X 1.1mm H, IPC Medium Density"
  rect 1x0.6 smd: 1(-1.15,0.95) 2(-1.15,-0.95) 3(1.15,0)
  silkscreen extent -1.53,-1.45 0.33,1.87, body extent -1.08,-1.5 1.25,1.5, height 1.1
SOT190P230X110-4N [mm] "SOT143, SOT, 1.90mm Pitch; 4 Pin, 1.30mm W X 2.90mm L X 1.10mm H body, IPC Medium Density"
  rect 1x1 smd: 1(-1.15,0.75)
  rect 1x0.6 smd: 2(-1.15,-0.95) 3(1.15,-0.95) 4(1.15,0.95)
  silkscreen extent -1.52,-1.45 0.33,1.88, body extent -1.25,-1.5 1.25,1.5, height 1.1
TPS127 [mm] "1.27 x  1.27mm SMD Test Point Area"
  rect 1.27x1.27 smd paste-1.27: 1(0,0)
  silkscreen extent -0.94,-0.94 0.94,0.94
XFMR_MINI-CIRCUITS_AT224 [mm] "MINI-CIRCUITS RF Transformer, Case AT224 - Body 3.81X3.81mm"
  rect 0.76x1.65 smd: 1(-1.27,1.59) 2(0,1.59) 3(1.27,1.59) 4(1.27,-1.59) 6(-1.27,-1.59)
  silkscreen extent -2.3,-0.37 1.91,1.73, body extent -1.9,-1.9 1.91,1.91, height 3.81

## Part data
C1 C3: library part CC0402_100NF_16V_10%_X5R, "Non-polarised capacitor", Case=0402, Manufacturer=GENERIC, Manufacturer1 ComponentHeight=0.55mm, Manufacturer1 Example=MURATA, Manufacturer1 Part Number=GRM155R61C104KA88D, Tolerance=±10%, Voltage=16V, Author="CERN DEM JLC", Component Type=Standard, HelpURL=\\cern.ch\dfs\Applications\Altium\Datasheets\CC0402_X5R_MURATA_GRM.pdf, Manufacturer Part Number=CC0402_100NF_16V_10%_X5R, Mounted=Yes, Part Description="SMD Multilayer Chip Ceramic Capacitor", Part Number=CC0402_100NF_16V_10%_X5R, Pin Count=2, Sense=No, SMD=Yes, Socket=No, Status=None, TC=X5R
  C1: CreateDate=10/12/2013, LatestRevisionDate=10/12/2013
  C3: CreateDate=10.12.2013, LatestRevisionDate=10.12.2013
C2 C4: library part CC0603_NO-VALUE, "Non-polarised capacitor", Case=0603, Manufacturer1 ComponentHeight=0.9mm, Author="CERN DEM MR", Component Type=Standard, CreateDate=22.11.2016, HelpURL=Undefined, LatestRevisionDate=22.11.2016, Manufacturer=Undefined, Manufacturer Part Number=CC0603_NO-VALUE, Mounted=No, Part Description="Reserved Footprint For 0603(1608) Chip Ceramic Capacitor", Part Number=CC0603_NO-VALUE, Pin Count=2, Sense=No, SMD=Yes, Socket=No, Status=None
C5: library part CC1206_47PF_1KV_10%_C0G, "Non-polarised capacitor", Case=1206, Manufacturer=GENERIC, Manufacturer1 ComponentHeight=1.45mm, Manufacturer1 Example=AVX, Manufacturer1 Part Number=1206AA470KAT1A, Tolerance=±10%, Voltage=1KV, Author="CERN DEM BC", Component Type=Standard, CreateDate=14.12.2021, HelpURL=\\cern.ch\dfs\Applications\Altium\Datasheets\CC1206_C0G_AVX_HV-MLC.pdf, LatestRevisionDate=14.12.2021, Manufacturer Part Number=CC1206_47PF_1KV_10%_C0G, Mounted=Yes, Part Description="High Voltage MLC Chip Capacitor", Part Number=CC1206_47PF_1KV_10%_C0G, Pin Count=2, Sense=No, SMD=Yes, Socket=No, Status=None, TC=C0G/NP0
C6: library part CC0603_10UF_16V_20%_X5R, "Non-polarised capacitor", Case=0603, Manufacturer=GENERIC, Manufacturer1 ComponentHeight=0.8mm, Manufacturer1 Example=MURATA, Manufacturer1 Part Number=GRM188R61C106MA73D, Tolerance=±20%, Voltage=16V, Author="CERN DEM MR", Component Type=Standard, CreateDate=02.03.2016, HelpURL=\\cern.ch\dfs\Applications\Altium\Datasheets\CC0603_X5R_MURATA_GRM.pdf, LatestRevisionDate=02.03.2016, Manufacturer Part Number=CC0603_10UF_16V_20%_X5R, Mounted=Yes, Part Description="SMD Multilayer Chip Ceramic Capacitor", Part Number=CC0603_10UF_16V_20%_X5R, Pin Count=2, Sense=No, SMD=Yes, Socket=No, Status=None, TC=X5R
C7 C8 C9: library part CC1206_47UF_10V_10%_X5R, "Non-polarised capacitor", Case=1206, Manufacturer=GENERIC, Manufacturer1 ComponentHeight=1.8mm, Manufacturer1 Example=MURATA, Manufacturer1 Part Number=GRM31CR61A476KE15, Tolerance=±10%, Voltage=10V, Author="CERN DEM MR", Component Type=Standard, CreateDate=24.06.2016, HelpURL=\\cern.ch\dfs\Applications\Altium\Datasheets\CC1206_X5R_MURATA_GRM.pdf, LatestRevisionDate=24.06.2016, Manufacturer Part Number=CC1206_47UF_10V_10%_X5R, Mounted=Yes, Part Description="SMD Multilayer Chip Ceramic Capacitor", Part Number=CC1206_47UF_10V_10%_X5R, Pin Count=2, Sense=No, SMD=Yes, Socket=No, Status=None, TC=X5R
C10 C11 C12 C13 C14 C15 C16 C17 C18 C19 C20 C21 C22 C23 C25 C26 C27 C28 C31 C32: library part CC0201_100NF_6.3V_10%_X5R, "Non-polarised capacitor", Case=0201, Manufacturer=GENERIC, Manufacturer1 ComponentHeight=0.33mm, Manufacturer1 Example=AVX, Manufacturer1 Part Number=02016D104KAT2A, Tolerance=±10%, Voltage=6.3V, Author="CERN DEM JLC", Component Type=Standard, HelpURL=\\cern.ch\dfs\Applications\Altium\Datasheets\CC0201_X5R_AVX.pdf, Manufacturer Part Number=CC0201_100NF_6.3V_10%_X5R, Mounted=Yes, Part Description="SMD Multilayer Chip Ceramic Capacitor", Part Number=CC0201_100NF_6.3V_10%_X5R, Pin Count=2, Sense=No, SMD=Yes, Socket=No, Status="Not Recommended", TC=X5R
  C10 C11 C12 C13 C14 C15 C16 C17 C18 C19 C20 C21 C22 C23 C25 C26 C27 C28: CreateDate=2007-12-03, LatestRevisionDate=2007-12-03
  C31 C32: CreateDate=03.12.2007, LatestRevisionDate=03.12.2007
C24: library part CC0402_1UF_16V_10%_X5R, "Non-polarised capacitor", Case=0402, Manufacturer=GENERIC, Manufacturer1 ComponentHeight=0.55mm, Manufacturer1 Example=TDK, Manufacturer1 Part Number=C1005X5R1C105KT, Tolerance=±10%, Voltage=16V, Author="CERN DEM JLC", Component Type=Standard, CreateDate=2012-10-25, HelpURL=\\cern.ch\dfs\Applications\Altium\Datasheets\CC0402_X5R_TDK_C.pdf, LatestRevisionDate=2012-10-25, Manufacturer Part Number=CC0402_1UF_16V_10%_X5R, Mounted=Yes, Part Description="SMD Multilayer Chip Ceramic Capacitor", Part Number=CC0402_1UF_16V_10%_X5R, Pin Count=2, Sense=No, SMD=Yes, Socket=No, Status=Preferred, TC=X5R
C29: library part CC0201_470NF_4V_20%_X5R, "Non-polarised capacitor", Case=0201, Manufacturer=GENERIC, Manufacturer1 ComponentHeight=0.33mm, Manufacturer1 Example="TAIYO YUDEN", Manufacturer1 Part Number=AMK063BJ474MP-F, Tolerance=±20%, Voltage=4V, Author="CERN DEM JLC", Component Type=Standard, CreateDate=27.05.2010, HelpURL=\\cern.ch\dfs\Applications\Altium\Datasheets\CC0201_X5R_TAIYO-YUDEN_STANDARD-CLASS2.pdf, LatestRevisionDate=27.05.2010, Manufacturer Part Number=CC0201_470NF_4V_20%_X5R, Mounted=Yes, Part Description="SMD Multilayer Chip Ceramic Capacitor", Part Number=CC0201_470NF_4V_20%_X5R, Pin Count=2, Sense=No, SMD=Yes, Socket=No, Status="Not Recommended", TC=X5R
C30: library part CC0402_22PF_50V_5%_C0G, "Non-polarised capacitor", Case=0402, Manufacturer=GENERIC, Manufacturer1 ComponentHeight=0.55mm, Manufacturer1 Example=KEMET, Manufacturer1 Part Number=C0402C220J5GACTU, Tolerance=±5%, Voltage=50V, Author="CERN DEM JLC", Component Type=Standard, CreateDate=2007-12-03, HelpURL="\\cern.ch\dfs\Applications\Altium\Datasheets\CC0805_C0G_KEMET_(Commercial Grade).pdf", LatestRevisionDate=2007-12-03, Manufacturer Part Number=CC0402_22PF_50V_5%_C0G, Mounted=Yes, Part Description="SMD Multilayer Chip Ceramic Capacitor", Part Number=CC0402_22PF_50V_5%_C0G, Pin Count=2, Sense=No, SMD=Yes, Socket=No, Status=Preferred, TC=C0G/NP0
D1: "Ultra Low Capacitance Double Rail-to-Rail ESD Protection Diode", Case=SOT143B, Manufacturer="NXP SEMICONDUCTORS", Voltage=5.5V, Author="CERN DEM JLC", Bonding=No, Component Type=Standard, ComponentHeight=1.1mm, CreateDate=22.03.2011, Device=PRTR5V0U2X, HelpURL=\\cern.ch\dfs\Applications\Altium\Datasheets\PRTR5V0U2X.pdf, LatestRevisionDate=22.03.2011, Manufacturer Part Number=PRTR5V0U2X, Mounted=Yes, PackageDescription="SOT143B, SOT, 1.90mm Pitch; 4 Pin, 1.30mm W X 2.90mm L X 1.10mm H body, IPC Medium Density", Part Description="Ultra Low Capacitance (1pF) Double Rail-to-Rail ESD Protection Diode (8kV)", Part Number=PRTR5V0U2X, Pin Count=4, PressFit=No, Sense=No, SMD=Yes, Socket=No
D2: "Serial Schottky Diode", Case=SOT323, Manufacturer="NXP SEMICONDUCTORS", Power=70mA, Voltage=70V, Author="CERN DEM JLC", Bonding=No, Component Type=Standard, ComponentHeight=1.10mm, CreateDate=05.12.2013, Device=BAS70-04W, HelpURL=\\cern.ch\dfs\Applications\Altium\Datasheets\BAS70-04W.pdf, LatestRevisionDate=05.12.2013, Manufacturer Part Number=BAS70-04W, Mounted=Yes, PackageDescription="SOT323, 0.65mm Pitch; 3 Pin, 1.25mm W X 2.00mm L X 1.10mm H body, IPC Medium Density", Part Description="Dual Series General-Purpose Schottky Diodes", Part Number=BAS70-04W, Pin Count=3, PressFit=No, Sense=No, SMD=Yes, Socket=No
FTG1 FTG2 FTG3: library part FIDUCIAL_TARGET_S100-200, "Fiducial Target", Author="CERN DEM JLC", Component Type="Standard (No BOM)", ComponentHeight=0mm, CreateDate=09.02.2010, Family=Fiducial, HelpURL=Undefined, LatestRevisionDate=04.04.2012, Mounted=No, PackageDescription="Square Fiducial Target, Top Layer, 1.0mm, Top Solder 2.0mm, Keepout =2.0mm", Part Description="Square Fiducial Target, Top Layer, 1.0mm, Top Solder 2.0mm, Keepout =2.0mm", Part Number=FIDUCIAL_TARGET_S100-200, Pin Count=1, Sense=No, SMD=Yes, Socket=No, Status=None
IC1: library part 27514, Case=SO8, AN=27514, Extra="USB-Schalter-ICs 2x1.5A 2.7V-5.5V", H-ART=AP2196SG-13, HelpURL=b:\AD\adlib\datasheet\AP21x6\, Mixed=SMT
IC2: "3.2A Current Limit High Side Switch IC", Case=TSSOP8, Manufacturer=ROHM, Author="CERN DEM BC", Bonding=No, Component Type=Standard, ComponentHeight=1.1mm, CreateDate=14.06.2021, Device=BD82046FVJ, HelpURL=\\cern.ch\dfs\Applications\Altium\Datasheets\BD82046FVJ.pdf, LatestRevisionDate=14.06.2021, Manufacturer Part Number=BD82046FVJ, Mounted=Yes, PackageDescription="SOP, 0.65mm Pitch; 8 Pin, 3.00mm W X 3.00mm L X 1.10mm H body, IPC Medium Density", Part Description="3.2A Current Limit High Side Switch IC", Part Number=BD82046FVJ, Pin Count=8, PressFit=No, Sense=No, SMD=Yes, Socket=No
IC3: "Two Selectable Inputs, 8 LVPECL Outputs, SiGe Clock Fanout Buffer", Case=QFN32, Manufacturer="ANALOG DEVICES", Author="CERN DEM MR", Bonding=No, Component Type=Standard, ComponentHeight=0.8mm, CreateDate=2016-11-30, Device=ADCLK948BCPZ, HelpURL=\\cern.ch\dfs\Applications\Altium\Datasheets\ADCLK948BCPZ.pdf, LatestRevisionDate=2016-11-30, Manufacturer Part Number=ADCLK948BCPZ, Mounted=Yes, PackageDescription="QFN, 0.50mm Pitch, Square; 8 Pin X 8 Pin, 5mm X 5mm X 1.00mm H body (w/thermal tab 2.85 X 2.85mm),  IPC Medium Density", Part Description="Two Selectable Inputs, 8 LVPECL Outputs, SiGe Clock Fanout Buffer", Part Number=ADCLK948BCPZ, Pin Count=33, PressFit=No, Sense=No, SMD=Yes, Socket=No
J1: library part BELFUSE_L829-1J1T-43, "1 Port, RJ45, Gigabit Ethernet, MagJack Connector Module With Yellow And Green/Orange LEDs", Manufacturer="BEL MAGNETIC SOLUTIONS", Manufacturer Part Number=L829-1J1T-43, Author="CERN DEM JLC", Component Type=Standard, ComponentHeight=13.3mm, CreateDate=22.08.2011, Family=RJ45, HelpURL=\\cern.ch\dfs\Applications\Altium\Datasheets\BEL_L829-1J1T-43.pdf, LatestRevisionDate=20.09.2018, Mounted=Yes, Part Description="1 Port, Yellow/ Green-Orange LEDs,  RJ45 10/100/1000 Gigabit Ethernet, MagJack® Connector Module", Part Number=BELFUSE_L829-1J1T-43, Pin Count=19, PressFit=No, Sense=No, SMD=No, Socket=No, Status=None
J2: library part HIROSE_ZX62RD-AB-5P8, "5 Pin + 1 Shield USB Receptacle", Manufacturer="HIROSE (HRS)", Manufacturer Part Number=ZX62RD-AB-5P8, Author="CERN DEM JLC", Component Type=Standard, ComponentHeight=2.35mm, ComponentLink1Description=Package-Drawing, ComponentLink1URL=\\cern.ch\dfs\Applications\Altium\Datasheets\HIROSE_ZX62RD-AB-5P8_Package-Drawing.pdf, CreateDate=29.10.2014, Family="Micro-USB AB 2.0", HelpURL=\\cern.ch\dfs\Applications\Altium\Datasheets\HIROSE_ZX62RD-AB-5P8.pdf, LatestRevisionDate=22.06.2017, Mounted=Yes, Part Description="Micro-USB 2.0 Right Angle, SMD Type AB - Reverse (Top mount), Shell Through Hole", Part Number=HIROSE_ZX62RD-AB-5P8, Pin Count=7, PressFit=No, Sense=No, SMD=Yes, Socket=No, Status=Obsolete
J3 J4 J5 J6 J7 J8 J9 J10 J11 J12 J13 J14: library part HIROSE_U.FL-R-SMT-1(10), Manufacturer="HIROSE (HRS)", Manufacturer Part Number=U.FL-R-SMT-1(10), Author="CERN DEM JLC", Component Type=Standard, ComponentHeight=1.25mm, CreateDate=24.03.2010, Family=U.FL, HelpURL=\\cern.ch\dfs\Applications\Altium\Datasheets\HIROSE_U.FL-R-SMT-1(10).pdf, LatestRevisionDate=24.03.2010, Mounted=Yes, Part Description="Up to 6GHz Ultra Small Surface Mount Male Coaxial Connectors U.FL Series", Part Number=HIROSE_U.FL-R-SMT-1(10), Pin Count=2, PressFit=No, Sense=No, SMD=Yes, Socket=No, Status=None
J15: library part AMPHENOL_302102, Manufacturer=AMPHENOL, Manufacturer Part Number=302102, Author="CERN DEM MR", Component Type=Standard, ComponentHeight=5.09mm, CreateDate=28.11.2017, Family=SMP, HelpURL=\\cern.ch\dfs\Applications\Altium\Datasheets\AMPHENOL_302102.pdf, LatestRevisionDate=19.12.2017, Mounted=Yes, Part Description="50 Ohm RF Connector, SMP End Launch Jack for 1.6mm PCB,  Flat Tab Contact", Part Number=AMPHENOL_302102, Pin Count=2, PressFit=No, Sense=No, SMD=No, Socket=No, Status=None
J16: "WR-BTB Board to Board Connector, Female Receptacle, pitch 0.8mm, height 7.75mm, 40p", Contact Resistance=50mΩ, Insulation Resistance=100MΩ, Manufacturer="Wurth Elektronik", Operating Temperature Max=85°C, Operating Temperature Min=-55°C, Rated Current=0.5A, Withstanding Voltage=500VAC, Working Voltage=50VAC, Category="Board-to-Board Connectors", Compliance="Lead free / RoHS", ComponentLink1Description="Website Link", ComponentLink1URL=https://www.we-online.com/redexpert/article/658807713040?ad, ComponentLink2Description="Datasheet Link", ComponentLink2URL=https://www.we-online.com/redexpert/spec/658807713040?ad, Gender="Female Receptacle", Height=7.75mm, Manufacturer Part Number=658807713040, Match Code=WR-BTB, Mount="Surface Mount", Number of Pins=40, Orientation=Vertical, Packaging="Tape and Reel", Pitch=0.8mm
L1: library part IND0504_WURTH_7442335900, "Inductor Common Mode", Case=0504, Manufacturer="WURTH ELEKTRONIK", Manufacturer Part Number=7442335900, Power=500mA, Resistance=0.27R, Tolerance=±25%, Author="CERN DEM JMW", Component Type=Standard, ComponentHeight=1.1mm, CreateDate=17.10.2019, HelpURL=\\cern.ch\dfs\Applications\Altium\Datasheets\IND0504_WURTH_7442335900.pdf, LatestRevisionDate=17.10.2019, Mounted=Yes, Part Description="Common Mode SMD Line Filter (WE-CNSW Series)", Part Number=IND0504_WURTH_7442335900, Pin Count=4, Sense=No, SMD=Yes, Socket=No
L2: library part IND0603_MURATA_BLM18SG121TN1D, "Inductor", Case=0603, Manufacturer=MURATA, Manufacturer Part Number=BLM18SG121TN1D, Power=3A, Resistance=0.025R, Tolerance=±25%, Author="CERN DEM JLC", Component Type=Standard, ComponentHeight=0.65mm, CreateDate=23.07.2014, HelpURL=\\cern.ch\dfs\Applications\Altium\Datasheets\IND0603_MURATA_BLM18S.pdf, LatestRevisionDate=23.07.2014, Mounted=Yes, Part Description="SMD EMIFIL Suppression Chip Ferrite Bead", Part Number=IND0603_MURATA_BLM18SG121TN1D, Pin Count=2, Sense=No, SMD=Yes, Socket=No, Status=None
R1 R3: library part R0603_340R_0.1%_0.063W_10PPM, "Resistor - 0.1%", Case=0603, Manufacturer=GENERIC, Manufacturer1 ComponentHeight=0.5mm, Manufacturer1 Example="TYCO HOLSWORTHY", Manufacturer1 Part Number=RN73C1J340RBTDF, Power=0.063W, Tolerance=±0.1%, Author="CERN DEM JLC", Component Type=Standard, CreateDate=03.12.2007, HelpURL=\\cern.ch\dfs\Applications\Altium\Datasheets\R0603_Tyco_RN73.pdf, LatestRevisionDate=13.03.2008, Manufacturer Part Number=R0603_340R_0.1%_0.063W_10PPM, Mounted=Yes, Part Description="Thin Film Chip Resistor", Part Number=R0603_340R_0.1%_0.063W_10PPM, Pin Count=2, PressFit=No, Sense=No, SMD=Yes, Socket=No, Status="Not Recommended", TC=±10ppm
R2 R8 R9 R24: library part R0402_0R_JUMPER, "Resistor", Case=0402, Manufacturer=GENERIC, Manufacturer1 ComponentHeight=0.4mm, Manufacturer1 Example="YAGEO PHYCOMP", Manufacturer1 Part Number=232270591001L, Author="CERN DEM JLC", Component Type=Standard, HelpURL=\\cern.ch\dfs\Applications\Altium\Datasheets\R0402_Phycomp_RC0402.pdf, Manufacturer Part Number=R0402_0R_JUMPER, Mounted=Yes, Part Description="1A (0.05R Max DC Resistance) Zero Ohm Jumper", Part Number=R0402_0R_JUMPER, Pin Count=2, PressFit=No, Sense=No, SMD=Yes, Socket=No, Status="Not Recommended"
  R2: CreateDate=03/12/2007, LatestRevisionDate=17/10/2012
  R8 R9 R24: CreateDate=03.12.2007, LatestRevisionDate=17.10.2012
R4 R5: library part R0402_1K_1%_0.0625W_100PPM, "Resistor - 1%", Case=0402, Manufacturer=GENERIC, Manufacturer1 ComponentHeight=0.4mm, Manufacturer1 Example="YAGEO PHYCOMP", Manufacturer1 Part Number=232270671002L, Power=0.0625W, Tolerance=±1%, Author="CERN DEM JLC", Component Type=Standard, CreateDate=03.12.2007, HelpURL=\\cern.ch\dfs\Applications\Altium\Datasheets\R0402_Phycomp_RC0402.pdf, LatestRevisionDate=17.10.2012, Manufacturer Part Number=R0402_1K_1%_0.0625W_100PPM, Mounted=Yes, Part Description="General Purpose Thick Film Chip Resistor", Part Number=R0402_1K_1%_0.0625W_100PPM, Pin Count=2, PressFit=No, Sense=No, SMD=Yes, Socket=No, Status="Not Recommended", TC=±100ppm/°C
R6 R10 R11: library part R0402_10K_1%_0.0625W_100PPM, "Resistor - 1%", Case=0402, Manufacturer=GENERIC, Manufacturer1 ComponentHeight=0.4mm, Manufacturer1 Example="YAGEO PHYCOMP", Manufacturer1 Part Number=232270671003L, Power=0.0625W, Tolerance=±1%, Author="CERN DEM JLC", Component Type=Standard, CreateDate=03.12.2007, HelpURL=\\cern.ch\dfs\Applications\Altium\Datasheets\R0402_Phycomp_RC0402.pdf, LatestRevisionDate=17.10.2012, Manufacturer Part Number=R0402_10K_1%_0.0625W_100PPM, Mounted=Yes, Part Description="General Purpose Thick Film Chip Resistor", Part Number=R0402_10K_1%_0.0625W_100PPM, Pin Count=2, PressFit=No, Sense=No, SMD=Yes, Socket=No, Status="Not Recommended", TC=±100ppm/°C
R7: library part R1206_1M_1%_0.25W_100PPM, "Resistor - 1%", Case=1206, Manufacturer=GENERIC, Manufacturer1 ComponentHeight=0.65mm, Manufacturer1 Example="NIC COMPONENT", Manufacturer1 Part Number=NRC12F1004TRF, Power=0.25W, Tolerance=±1%, Author="CERN DEM JLC", Component Type=Standard, CreateDate=03.12.2007, HelpURL=\\cern.ch\dfs\Applications\Altium\Datasheets\R1206_NIC_NRC.pdf, LatestRevisionDate=13.03.2008, Manufacturer Part Number=R1206_1M_1%_0.25W_100PPM, Mounted=Yes, Part Description="General Purpose Thick Film Chip Resistor", Part Number=R1206_1M_1%_0.25W_100PPM, Pin Count=2, PressFit=No, Sense=No, SMD=Yes, Socket=No, Status=Preferred, TC=±100ppm/°C
R12 R13 R14 R15 R16 R17 R18 R19 R20 R21 R22 R23: library part R0402_200R_1%_0.0625W_100PPM, "Resistor - 1%", Case=0402, Manufacturer=GENERIC, Manufacturer1 ComponentHeight=0.4mm, Manufacturer1 Example="YAGEO PHYCOMP", Manufacturer1 Part Number=232270672001L, Power=0.0625W, Tolerance=±1%, Author="CERN DEM JLC", Component Type=Standard, CreateDate=03.12.2007, HelpURL=\\cern.ch\dfs\Applications\Altium\Datasheets\R0402_Phycomp_RC0402.pdf, LatestRevisionDate=17.10.2012, Manufacturer Part Number=R0402_200R_1%_0.0625W_100PPM, Mounted=Yes, Part Description="General Purpose Thick Film Chip Resistor", Part Number=R0402_200R_1%_0.0625W_100PPM, Pin Count=2, PressFit=No, Sense=No, SMD=Yes, Socket=No, Status="Not Recommended", TC=±100ppm/°C
R25: library part R0402_NO-VALUE, "Resistor", Case=0402, Author="CERN DEM JLC", Component Type=Standard, CreateDate=03.12.2007, HelpURL=Undefined, LatestRevisionDate=13.03.2008, Manufacturer=Undefined, Manufacturer1 ComponentHeight=Undefined, Manufacturer1 Example=Undefined, Manufacturer1 Part Number=Undefined, Manufacturer Part Number=R0402_NO-VALUE, Mounted=No, Part Description="Reserved Footprint For a 0402 (1005) Chip Resistor", Part Number=R0402_NO-VALUE, Pin Count=2, PressFit=No, Sense=No, SMD=Yes, Socket=No, Status=None
R26: library part R0402_100R_0.1%_0.063W_25PPM, "Resistor - 0.1%", Case=0402, Manufacturer=GENERIC, Manufacturer1 ComponentHeight=0.35mm, Manufacturer1 Example="TE CONNECTIVITY", Manufacturer1 Part Number=CPF0402B100RE1, Power=0.063W, Tolerance=±0.1%, Author="CERN DEM JMW", Component Type=Standard, CreateDate=22.09.2015, HelpURL=\\cern.ch\dfs\Applications\Altium\Datasheets\R0402_TYCO_CPF.pdf, LatestRevisionDate=22.09.2015, Manufacturer Part Number=R0402_100R_0.1%_0.063W_25PPM, Mounted=Yes, Part Description="Thin Film Precision Resistor", Part Number=R0402_100R_0.1%_0.063W_25PPM, Pin Count=2, PressFit=No, Sense=No, SMD=Yes, Socket=No, Status="Not Recommended", TC=±25ppm/°C
T1 T2: "NPN Transistor", Case=SOT23-3, Manufacturer="NXP SEMICONDUCTORS", Author="CERN DEM JLC", Bonding=No, Component Type=Standard, ComponentHeight=1.1mm, CreateDate=14.06.2011, Device=BC847B, HelpURL=\\cern.ch\dfs\Applications\Altium\Datasheets\BC847B.pdf, LatestRevisionDate=14.06.2011, Manufacturer Part Number=BC847B, Mounted=Yes, PackageDescription="SOT23, 0.95mm Pitch; 3 Pin, 1.30mm W X 2.90mm L X 1.10mm H body, IPC Medium Density", Part Description="45V 100mA NPN General-Purpose Transistor", Part Number=BC847B, Pin Count=3, PressFit=No, Sense=No, SMD=Yes, Socket=No
TP1 TP2 TP3 TP4 TP5: library part SMD_PAD_1.27X1.27MM, Author="CERN DEM JLC", Component Type="Standard (No BOM)", ComponentHeight=0mm, CreateDate=12.01.2008, Family="Test Point", HelpURL=Undefined, LatestRevisionDate=12.01.2008, Mounted=No, PackageDescription="1.27mm x 1.27mm PCB Copper Area (SMD Test Point)", Part Description="1.27mm x 1.27mm PCB Copper Area (SMD Test Point)", Part Number=SMD_PAD_1.27X1.27MM, Pin Count=1, Sense=No, SMD=No, Socket=No, Status=None
TR1: library part XFMR_MINI-CIRCUITS_TC1-1-13M+, "50 Ohms 4.5 To 3000MHz RF Transformers", Manufacturer=MINI-CIRCUITS, Manufacturer Part Number=TC1-1-13M+, Author="CERN DEM JLC", Component Type=Standard, ComponentHeight=3.81mm, CreateDate=30.11.2011, HelpURL=\\cern.ch\dfs\Applications\Altium\Datasheets\XFMR_MINI-CIRCUITS_TC1-1-13M+.pdf, LatestRevisionDate=30.11.2011, Mounted=Yes, Part Description="50 Ohms 4.5 to 3000MHz RF Transformer", Part Number=XFMR_MINI-CIRCUITS_TC1-1-13M+, Pin Count=5, Sense=No, SMD=Yes, Socket=No, Status=None

## Free pads (board coordinates)
  round 6 hole 3.2: 0(29.253,4.032) 0(29.253,69.032) 0(59.253,4.032) 0(59.253,69.032)

## Via types
v1: diameter 0.5, hole 0.2, Top Layer to Bottom Layer, tented both sides, 227 vias
v2: diameter 0.4, hole 0.2, Top Layer to Bottom Layer, 9 vias
v3: diameter 0.4, hole 0.2, Top Layer to Bottom Layer, tented both sides, 7 vias
v4: diameter 0.6, hole 0.3, Top Layer to Bottom Layer, tented both sides, 2 vias

## Nets (pads, with @x,y where several pads share a name; then routed paths per layer and width w, separated by ;. In a path a pad name is that pad's centre, name@x,y a point inside that pad or via, vN(x,y) a via of type N, cw(c..) or ccw(c..) an arc to the next point about the centre after c; other vN are vias at no path point)
BUF_OUT0_N: C11.1 IC3.29 R13.1 | length 13.1
  Top Layer w0.12: IC3.29@39.86,29.188 39.86,29.498 39.735,29.623 39.735,30.716 44.954,35.935 45.42,35.935 45.978,35.935 46.61,35.303 R13.1@46.61,35.283 ; R13.1@46.61,35.511 46.818,35.511 47.116,35.809 48.17,35.809 48.256,35.723 48.462,35.723 C11.1@48.602,35.583
BUF_OUT0_P: C10.1 IC3.30 R12.1 | length 13.4
  Top Layer w0.12: IC3.30@39.36,29.188 39.36,29.498 39.485,29.623 39.485,30.82 44.85,36.185 45.524,36.185 46.048,36.185 46.23,36.185 46.402,36.357 R12.1@46.61,36.357 ; R12.1@46.61,36.585 46.61,36.565 47.116,36.059 48.17,36.059 48.256,36.145 48.462,36.145 C10.1@48.602,36.285
BUF_OUT1_N: C14.1 IC3.27 R15.1 | length 14.3
  Top Layer w0.12: IC3.27@40.86,29.188 40.86,29.498 40.735,29.623 40.735,30.516 42.423,32.204 43,32.204 43.162,32.204 43.429,31.937 43.429,30.36 43.843,29.946 44.585,29.946 44.999,30.36 44.999,31.937 45.267,32.204 45.4,32.204 46.084,32.204 46.36,31.928 46.38,31.928 R15.1@46.61,31.698 ; R15.1@46.61,31.678 R15.1@46.61,31.698 ; C14.1@48.602,31.985 48.462,32.125 48.249,32.125 48.17,32.204 47.116,32.204 46.818,31.906 46.61,31.906 R15.1@46.61,31.698
BUF_OUT1_P: C12.1 IC3.28 R14.1 | length 14.6
  Top Layer w0.12: IC3.28@40.36,29.188 40.36,29.498 40.485,29.623 40.485,30.62 42.319,32.454 43,32.454 43.265,32.454 43.679,32.04 43.679,30.463 43.947,30.196 44.482,30.196 44.749,30.463 44.749,32.04 45.163,32.454 45.4,32.454 46.104,32.454 46.61,32.96 47.116,32.454 48.17,32.454 48.263,32.547 48.462,32.547 C12.1@48.602,32.687
BUF_OUT2_N: C16.1 IC3.23 R17.1 | length 7
  Top Layer w0.12: IC3.23@42.56,27.988 42.87,27.988 42.995,28.113 43.532,28.113 44.018,28.6 46.104,28.6 R17.1@46.61,28.094 ; R17.1@46.61,28.074 R17.1@46.61,28.094 ; C16.1@48.602,28.36 48.577,28.36 48.437,28.5 48.437,28.524 48.361,28.6 47.116,28.6 46.818,28.302 46.61,28.302 R17.1@46.61,28.094
BUF_OUT2_P: C15.1 IC3.24 R16.1 | length 6.8
  Top Layer w0.12: IC3.24@42.56,28.488 42.87,28.488 42.995,28.363 43.428,28.363 43.915,28.85 46.104,28.85 R16.1@46.61,29.356 ; R16.1@46.61,29.376 R16.1@46.61,29.356 ; C15.1@48.602,29.079 48.577,29.079 48.437,28.939 48.437,28.92 48.367,28.85 47.116,28.85 R16.1@46.61,29.356
BUF_OUT3_N: C18.1 IC3.21 R19.1 | length 8.3
  Top Layer w0.12: IC3.21@42.56,26.988 42.87,26.988 42.995,27.113 44.822,27.113 45.1,26.835 45.1,25.381 45.437,25.045 46.054,25.045 46.61,24.489 R19.1@46.61,24.469 ; R19.1@46.61,24.697 46.818,24.697 47.116,24.995 48.361,24.995 48.437,24.919 48.437,24.9 48.577,24.76 C18.1@48.602,24.76
BUF_OUT3_P: C17.1 IC3.22 R18.1 | length 8.2
  Top Layer w0.12: IC3.22@42.56,27.488 42.87,27.488 42.995,27.363 44.926,27.363 45.35,26.939 45.35,25.485 45.54,25.295 46.154,25.295 46.402,25.543 R18.1@46.61,25.543 ; R18.1@46.61,25.771 46.61,25.751 47.116,25.245 48.367,25.245 48.437,25.316 48.437,25.329 48.577,25.469 C17.1@48.602,25.469
BUF_OUT4_N: C21.1 IC3.19 R21.1 | length 10.1
  Top Layer w0.12: IC3.19@42.56,25.988 42.87,25.988 42.995,26.113 43.422,26.113 43.813,25.722 44.45,25.085 44.45,22.385 45.444,21.391 46.104,21.391 46.61,20.885 R21.1@46.61,20.865 ; R21.1@46.61,21.092 46.818,21.092 47.116,21.391 48.17,21.391 48.236,21.325 48.462,21.325 C21.1@48.602,21.185
BUF_OUT4_P: C20.1 IC3.20 R20.1 | length 10.1
  Top Layer w0.12: IC3.20@42.56,26.488 42.87,26.488 42.995,26.363 43.526,26.363 43.902,25.987 44.7,25.189 44.7,22.489 45.548,21.641 46.104,21.641 46.402,21.939 R20.1@46.61,21.939 ; R20.1@46.61,22.167 46.61,22.147 47.116,21.641 48.17,21.641 48.269,21.74 48.462,21.74 C20.1@48.602,21.88
BUF_OUT5_N: C23.1 IC3.17 R23.1 | length 13.4
  Top Layer w0.12: IC3.17@42.56,24.988 42.87,24.988 42.995,25.113 43.125,25.113 43.475,24.763 43.475,20.981 43.475,18.206 43.895,17.786 46.104,17.786 46.61,17.28 R23.1@46.61,17.26 ; R23.1@46.61,17.488 46.818,17.488 47.116,17.786 48.17,17.786 48.256,17.7 48.462,17.7 C23.1@48.602,17.56